# EAGLE board I2C_Bus_v1 (1) (EAGLE 9.7.0)

Size 12.7 x 25.26 mm. Coordinates in mm from the lower left corner, seen from the top.
Outline: 0,0 12.7,0 12.7,25.26 0,25.26 0,0
Copper layers (1*16): Top 0.035mm / dielectric 1.5mm / Bottom 0.035mm
Design rules "default": minimum track width 6mil, minimum drill 0.35mm, track to track 6mil, track to pad 6mil, pad to pad 6mil, via to via 6mil, smd to smd 6mil, copper to edge 40mil, drill to drill 6mil, minimum pad ring 10mil, minimum via ring 8mil, stop-mask expansion 4mil, vias tented up to drill 0mil, thermal gap 10mil
Holes 3.3 mm at 2.74,22.4 9.96,22.4 9.96,2.74 2.74,2.74

## Footprints (pad centres in the part's own frame; a part is rotated, then mirrored left to right if it is on the bottom)
61300411121 = drill 1.016 pad 1.651 long: 1 -3.81,0; 2 -1.27,0; 3 1.27,0; 4 3.81,0

## Placement (x,y rotation side)
J1  61300411121  [61300411121]  6.35,7.49 0 top
J2  61300411121  [61300411121]  6.35,10.03 0 top
J3  61300411121  [61300411121]  6.35,12.57 0 top
J4  61300411121  [61300411121]  6.35,15.11 0 top
J5  61300411121  [61300411121]  6.35,17.65 0 top

## Library data of the parts
J1-J5 = Aaron Electronics Library; CREATED_BY: PCBLayout.com; DIGI_KEY_PART_NUMBER: 732-5317-ND; MANUFACTURER: Wurth Electronics Inc.; MPN: 61300411121

## Nets
N$1: J1.1 J2.1 J3.1 J4.1 J5.1
N$2: J1.2 J2.2 J3.2 J4.2 J5.2
N$3: J1.3 J2.3 J3.3 J4.3 J5.3
N$4: J1.4 J2.4 J3.4 J4.4 J5.4

## Tracks (layer width: path | path; a pad name or v marks a point on that pad's centre or on a via)
N$1  (4 unrouted)
N$2  (4 unrouted)
N$3  (4 unrouted)
N$4  (4 unrouted)